# Altium PCB Schematics.PcbDoc
Units mm, origin at the board's own origin, x right, y up, seen from the top; angles counter-clockwise.
Board outline 51 x 43 mm, 2 copper layers (Top Layer, Bottom Layer); 29 components, 26 nets, 122 pads, 33 vias.
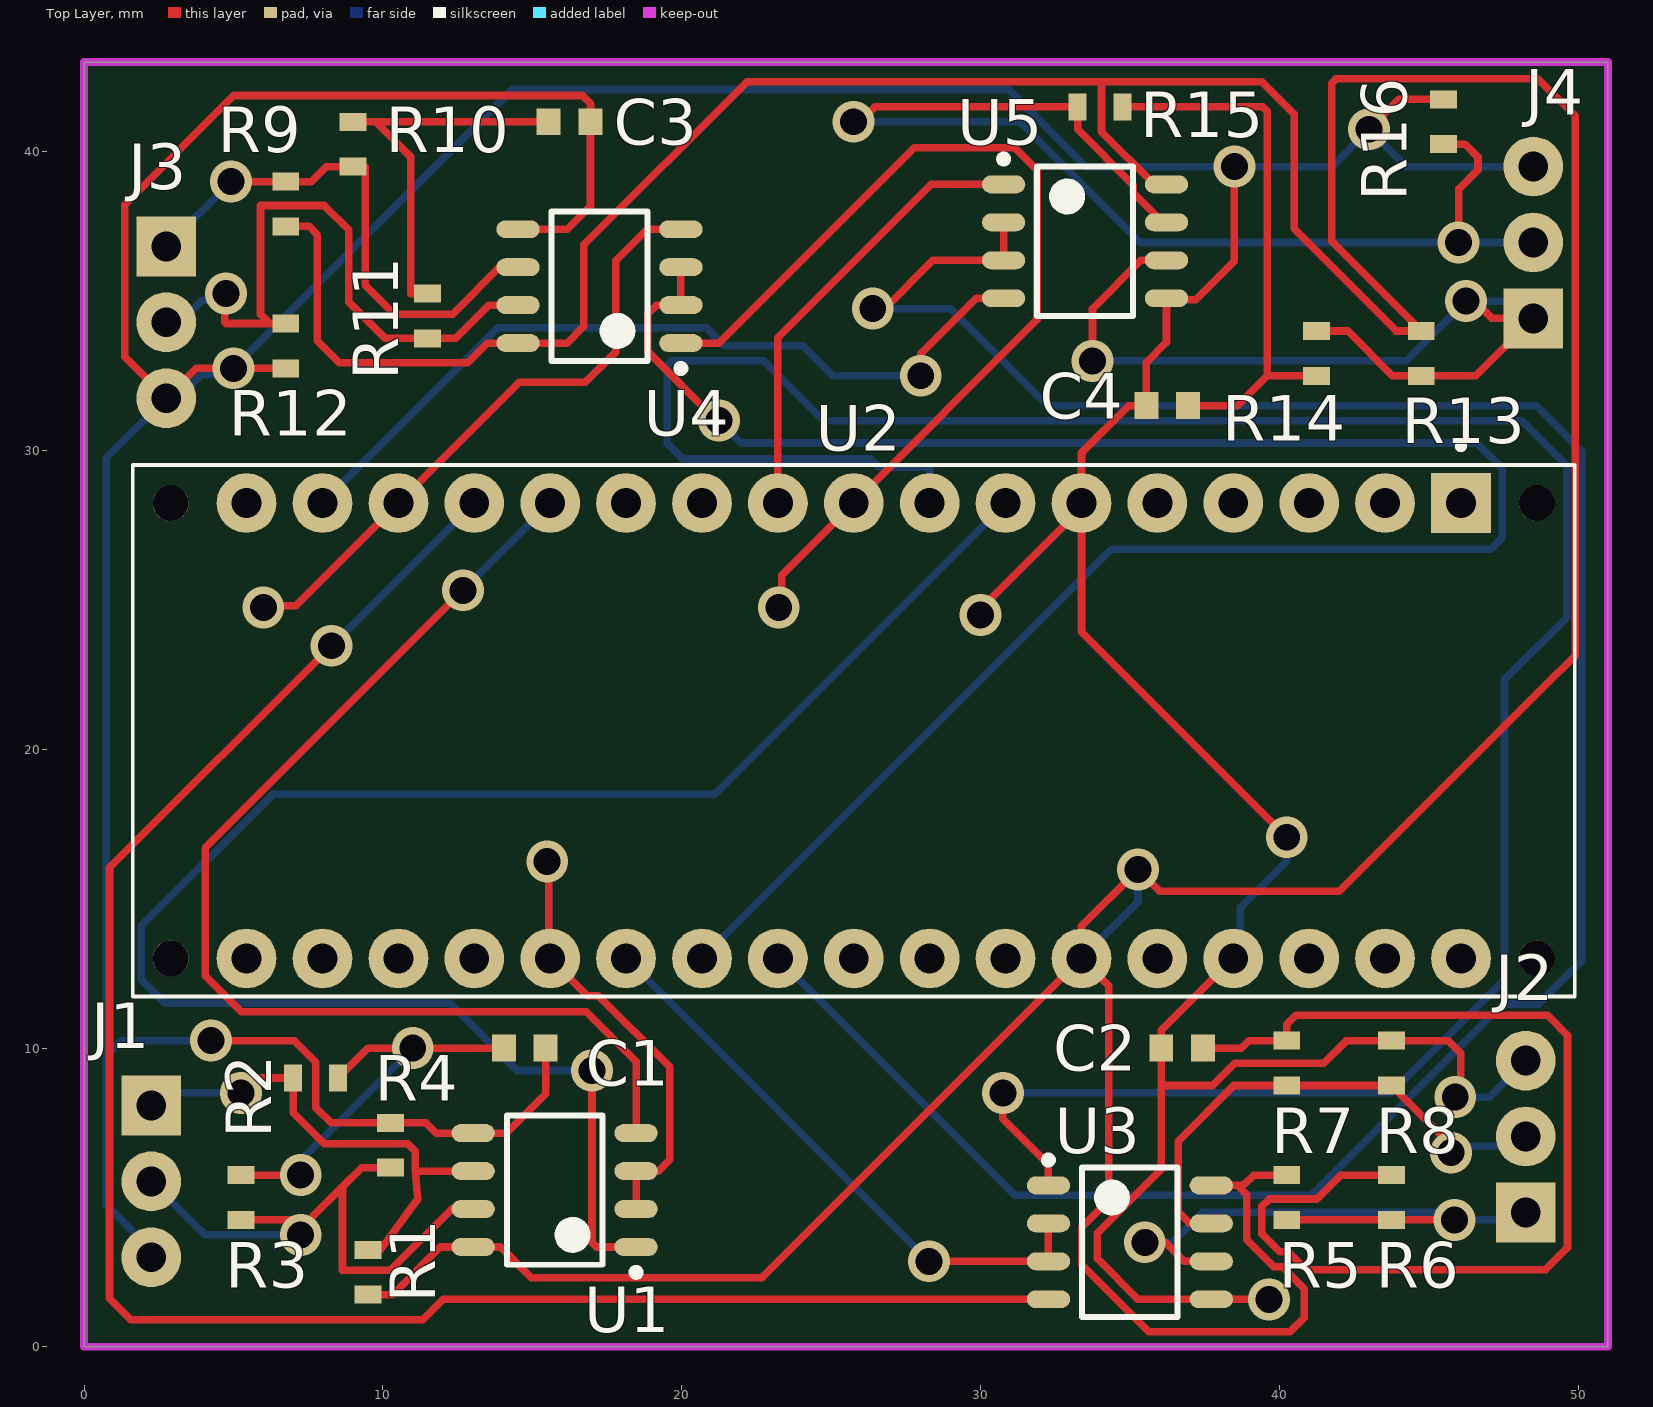
[diagram p0: Top Layer view]
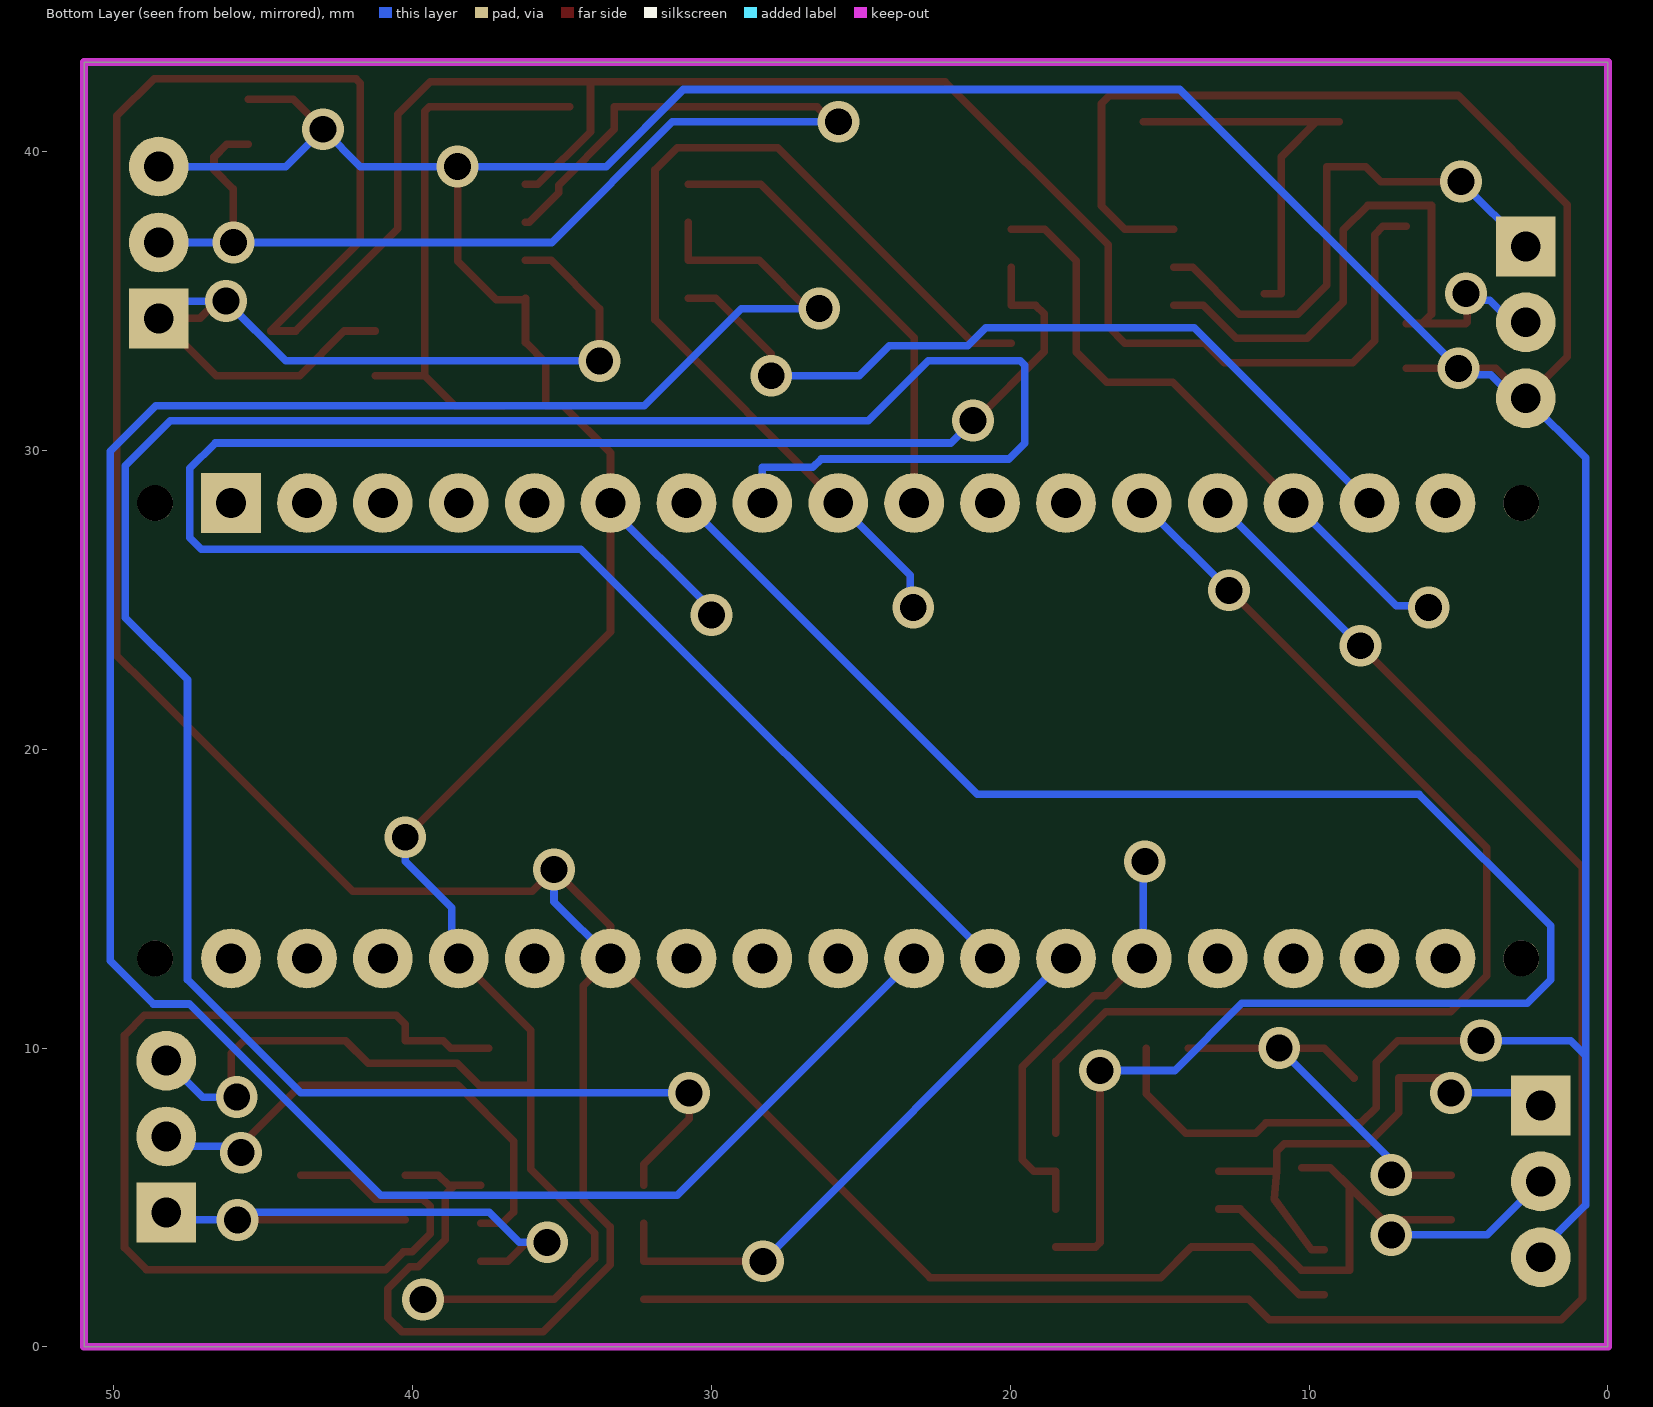
[diagram p1: Bottom Layer view, seen from below]
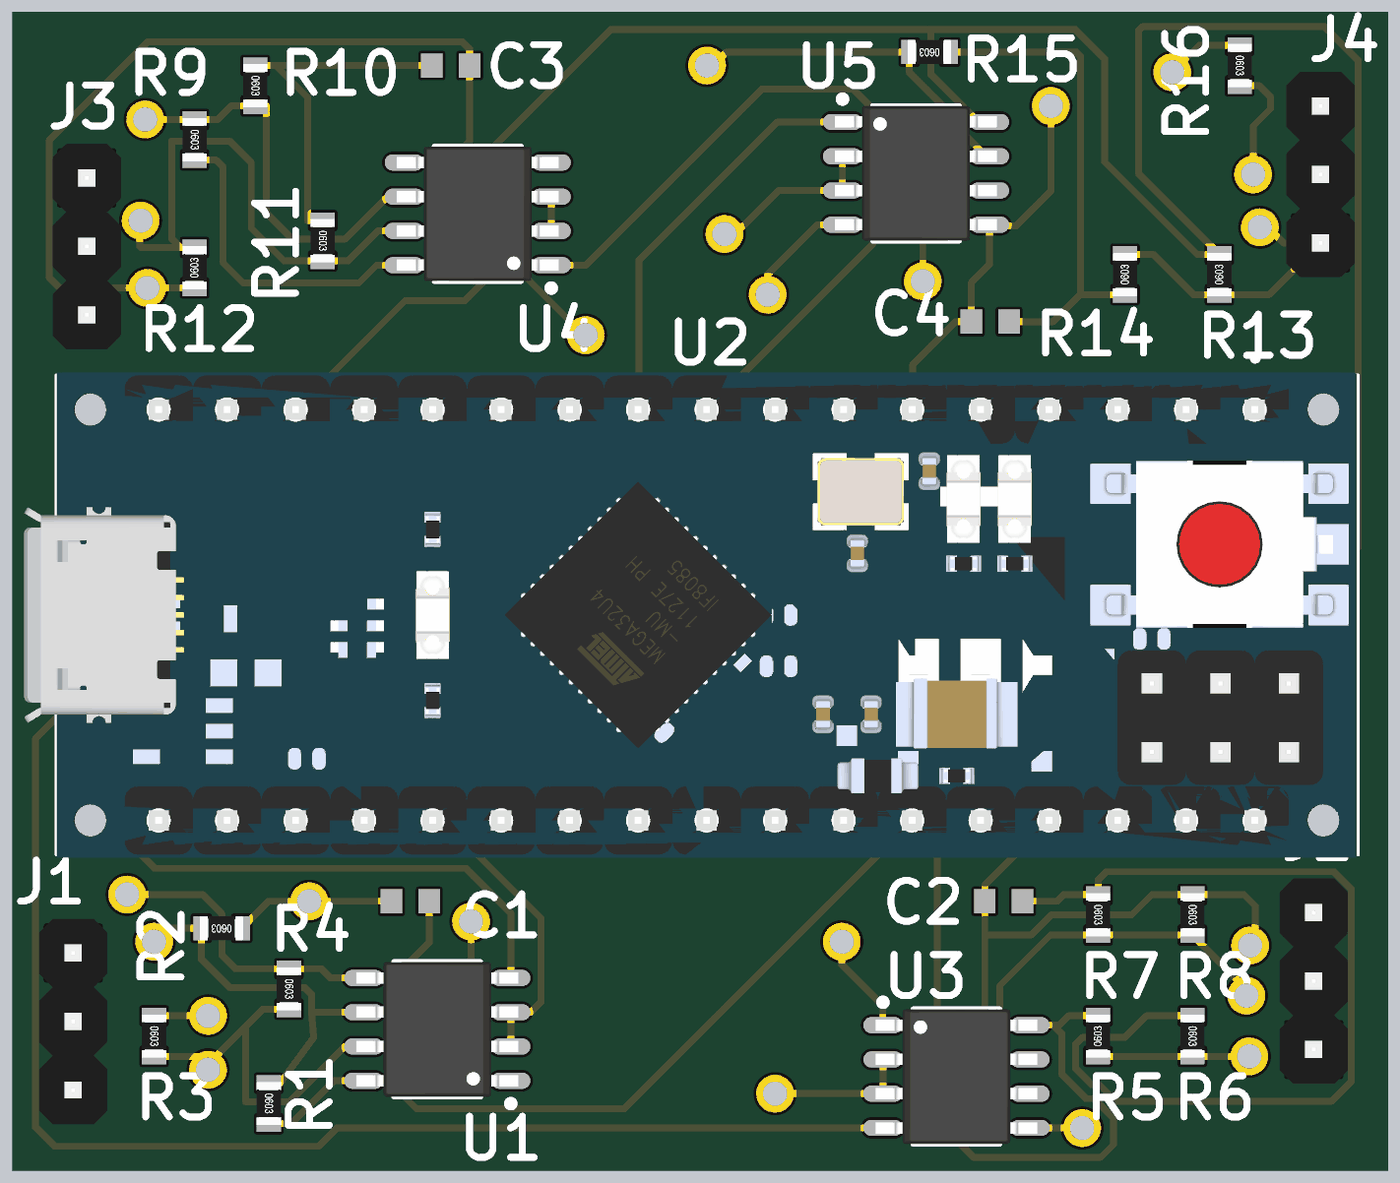
[diagram p2: 3D render of the assembled board from above, using the file's embedded part models]

## Layer stack, top to bottom
Top Solder: solder mask 0.0102, Solder Resist, Dk 3.5
Top Layer: signal copper 0.0356
Dielectric 1: dielectric 0.32, FR-4, Dk 4.8
Bottom Layer: signal copper 0.0356
Bottom Solder: solder mask 0.0102, Solder Resist, Dk 3.5

## Board outline
0,0 51,0 51,43 0,43

## Design rules (kind name [scope] priority, off if disabled: settings)
Clearance Clearance_1 [InNamedPolygon('GND_L02_P000')] p1: gap=1 ignorepadtopadclearanceinfootprint=FALSE
Clearance [All] p2: gap=0.254 ignorepadtopadclearanceinfootprint=FALSE except(0: Arc-Hole Track-Hole SMDPad-Hole THPad-Hole Via-Hole Fill-Hole Poly-Hole Region-Hole Text-Hole)
PlaneClearance [All] p1: clearance=1
PolygonConnect [All] p1: connectstyle=Relief reliefconductorwidth=0.254 reliefentries=4 polygonreliefangle="90 Angle" airgapwidth=0.254
RoutingVias [All] p1: holewidth=0.9 width=1.4 viastyle="Through Hole" minholewidth=0.711 minwidth=1.27 maxholewidth=0.9 maxwidth=1.4
SolderMaskExpansion [All] p1: expansion=0.102 istentingtop=FALSE
Width [All] p1: maxlimit=0.254 minlimit=0.254 preferedwidth=0.254
29 further rules are at their usual default settings.

## Classes and differential pairs
net class "DIFF PAIR DATA": D_N1 D_N2 D_N3 D_N4 D_P1 D_P2 D_P3 D_P4

## Components (designator, comment, footprint, x,y, rotation, side; value= is the part's Value field where it differs from the comment)
C1 "06035C104K4Z2A" 1608[0603] 14.75,10 r180 top
C2 "06035C104K4Z2A" 1608[0603] 36.75,10 r0 top
C3 "06035C104K4Z2A" 1608[0603] 16.25,41 r180 top
C4 "06035C104K4Z2A" 1608[0603] 36.25,31.5 r0 top
J1 "349873-345-34_2" "Header 1x3 male" 2.25,3 r0 top
J2 "349873-345-34_2" "Header 1x3 male" 48.25,9.58 r180 top
J3 "349873-345-34_2" "Header 1x3 male" 2.75,31.75 r0 top
J4 "349873-345-34_2" "Header 1x3 male" 48.5,39.5 r180 top
R1 "CPF-A-0603B100KE1" R0603 9.5,2.5 r270 top value=100K
R2 "CPF-A-0603B100KE1" R0603 7.75,9 r180 top value=60R
R3 "CPF-A-0603B100KE1" R0603 5.25,5 r270 top value=60R
R4 "CPF-A-0603B100KE1" R0603 10.25,6.75 r270 top value=100K
R5 "CPF-A-0603B100KE1" R0603 40.25,5 r90 top value=100K
R6 "CPF-A-0603B100KE1" R0603 43.75,5 r270 top value=60R
R7 "CPF-A-0603B100KE1" R0603 40.25,9.5 r270 top value=60R
R8 "CPF-A-0603B100KE1" R0603 43.75,9.5 r270 top value=100K
R9 "CPF-A-0603B100KE1" R0603 6.75,38.25 r270 top value=100K
R10 "CPF-A-0603B100KE1" R0603 9,40.25 r270 top value=60R
R11 "CPF-A-0603B100KE1" R0603 11.5,34.5 r270 top value=60R
R12 "CPF-A-0603B100KE1" R0603 6.75,33.5 r90 top value=100K
R13 "CPF-A-0603B100KE1" R0603 44.75,33.25 r90 top value=100K
R14 "CPF-A-0603B100KE1" R0603 41.25,33.25 r90 top value=60R
R15 "CPF-A-0603B100KE1" R0603 34,41.5 r180 top value=60R
R16 "CPF-A-0603B100KE1" R0603 45.5,41 r270 top value=100K
U1 "RS485 tranciever" ST485CDR 15.75,5.25 r180 top
U2 "A000053" *ARDUINO_A000053 25.76,20.62 r270 top
U3 "RS485 tranciever" ST485CDR 35,3.5 r0 top
U4 "RS485 tranciever" ST485CDR 17.25,35.5 r180 top
U5 "RS485 tranciever" ST485CDR 33.5,37 r0 top

## Footprints (in the part's own frame and the unit in brackets; to place one, negate y for a bottom-side part, rotate by r counter-clockwise, add the part's x,y. Pads: shape width x height; smd on the part's side, far side on the other; paste and mask are expansions set on the pad)
1608[0603] [mm] "Chip Capacitor, Body 1.6x0.8mm, IPC High Density"
  rect 0.8x0.9 smd: 1(-0.7,0) 2(0.7,0)
  body extent -0.87,-0.48 0.87,0.48, height 1.3
*ARDUINO_A000053 [mm]
  rect 2x2 hole 1: 1(-7.62,20.32)
  round 2 hole 1: 2(-7.62,17.78) 3(-7.62,15.24) 4(-7.62,12.7) 5(-7.62,10.16) 6(-7.62,7.62) 7(-7.62,5.08) 8(-7.62,2.54) 9(-7.62,0) 10(-7.62,-2.54) 11(-7.62,-5.08) 12(-7.62,-7.62) 13(-7.62,-10.16) 14(-7.62,-12.7) 15(-7.62,-15.24) 16(-7.62,-17.78) 17(-7.62,-20.32) 18(7.62,-20.32) 19(7.62,-17.78) 20(7.62,-15.24) 21(7.62,-12.7) 22(7.62,-10.16) 23(7.62,-7.62) 24(7.62,-5.08) 25(7.62,-2.54) 26(7.62,0) 27(7.62,2.54) 28(7.62,5.08) 29(7.62,7.62) 30(7.62,10.16) 31(7.62,12.7) 32(7.62,15.24) 33(7.62,17.78) 34(7.62,20.32)
  round 1.2 hole 1.2 unplated: None(-7.62,22.86) None(-7.62,-22.86) None(7.62,22.86) None(7.62,-22.86)
  silkscreen extent -9.62,-24.13 8.89,24.13, body extent -9,-25.33 9,24.08, height 13.1
"Header 1x3 male" [mm]
  rect 2x2 hole 1: 1(0,5.08)
  round 2 hole 1: 2(0,2.54) 3(0,0)
  body extent -1.27,-1.27 1.27,6.35, height 8.89
R0603 [mm]
  rect 0.6x0.9 smd: 1(-0.75,0) 2(0.75,0)
  body extent -0.8,-0.45 0.8,0.45, height 0.5
ST485CDR [mm] "SOIC, 8-Leads, Body 4.90x3.90mm, Pitch 1.27mm, IPC Medium Density"
  oval 1.45x0.6 smd: 1(-2.725,1.905) 2(-2.725,0.635) 3(-2.725,-0.635) 4(-2.725,-1.905) 5(2.725,-1.905) 6(2.725,-0.635) 7(2.725,0.635) 8(2.725,1.905)
  silkscreen extent -2.85,-2.5 1.6,2.88, body extent -3,-2.5 3,2.5, height 1.75

## Part data
C1 C2 C3 C4: "0.1ÂµF Â±10% 50V Ceramic Capacitor X7R 0603 _1608 Metric_", Package="1608 AVX", Digi-Key_Part_Number=478-6344-1-ND, MF=AVX, MP=06035C104K4Z2A, SnapEDA_Link=https://www.snapeda.com/parts/06035C104K4Z2A/AVX/view-part/572777/?ref=snap
J1 J2 J3 J4: "Header 1x3 male 2.54mm"
R1 R2 R3 R4 R5 R6 R7 R8 R9 R10 R11 R12 R13 R14 R15 R16: "R0603"
U1 U3 U4 U5: library part ST485CDR, "RS485 tranciever single", Supplier Part Number 1=1564307, Supplier 1=Farnell
U2: "MCU, ARDUINO MICRO, LEONARDO BASED, ATMEGA32u4, 5V, USB-MICRO", Package=None, Availability=Unavailable, MF=Arduino, MP=A000053, Price=None, SnapEDA_Link=https://www.snapeda.com/parts/A000053/Arduino/view-part/?ref=snap

## Via types
v1: diameter 1.4, hole 0.9, Top Layer to Bottom Layer, 33 vias

## Nets (pads, with @x,y where several pads share a name; then routed paths per layer and width w, separated by ;. In a path a pad name is that pad's centre, name@x,y a point inside that pad or via, vN(x,y) a via of type N, cw(c..) or ccw(c..) an arc to the next point about the centre after c; other vN are vias at no path point)
+5V: R1.2 R5.2 R9.2 R13.2 U1.8 U2.29 U3.8 U4.8 U5.8 | length 176.9
  Top Layer w0.254: R9.2 7.532,37.5 7.811,37.221 7.811,33.677 8.548,32.94 12.846,32.94 13.501,33.595 U4.8 16.168,33.595 16.727,34.154 16.727,36.877 22.188,42.338 34.05,42.338 ; R1.2 10.324,1.75 11.919,3.345 U1.8 13.937,3.345 14.974,2.308 22.688,2.308 U2.29 ; U5.8 35.813,38.905 34.05,40.669 34.05,42.338 ; U3.8 38.598,5.405 ; R5.2 39.144,5.75 38.799,5.405 38.598,5.405 ; U2.29 33.38,14.084 v1(35.273,15.977) 36,15.25 42.013,15.25 48.883,22.12 49.899,23.136 49.899,41.195 48.655,42.44 41.899,42.44 41.75,42.291 41.75,37 R13.2 43.919,34 40.498,37.421 40.498,41.252 39.412,42.338 34.05,42.338 ; U2.29 34.288,12.092 34.288,4.905 33.395,4.012 33.395,2.75 35.637,0.508 40.359,0.508 40.831,0.98 40.831,1.948 40.097,2.682 39.811,2.682 38.911,3.582 38.911,5.092 38.598,5.405
  Bottom Layer w0.254: U2.29 35.273,14.893 v1(35.273,15.977)
D_N1: J1.2 R3.2 R4.2 U1.7 | length 19.5
  Top Layer w0.254: R3.2 7,4.25 7.25,4 v1(7.25,3.75) ; v1@7.544,4.25 8.65,5.356 ; R4.2 9.294,6 8.65,5.356 ; U1.7 12.308,4.615 10.255,2.562 8.65,2.562 8.65,5.356
  Bottom Layer w0.254: J1.2 4.04,3.75 v1(7.25,3.75)
D_N2: J2.2 R7.2 R8.2 U3.7 | length 17.3
  Top Layer w0.254: U3.7 36.996,4.135 36.615,4.516 36.615,6.88 38.485,8.75 R7.2 R8.2 45.75,6.75 v1(45.75,6.5)
  Bottom Layer w0.254: v1(45.75,6.5) 45.969,6.719 47.929,6.719 J2.2
D_N3: J3.2 R11.2 R12.2 U4.7 | length 21.8
  Top Layer w0.254: v1(4.75,35.25) 4.713,35.213 4.713,34.29 4.753,34.25 6.222,34.25 ; R12.2 6.222,34.25 ; U4.7 13.549,34.865 12.434,33.75 R11.2 10.072,33.75 8.853,34.969 8.853,37.385 8.04,38.198 5.906,38.198 5.906,34.566 6.222,34.25
  Bottom Layer w0.254: J3.2 3.221,34.29 3.962,35.031 4.531,35.031 v1(4.75,35.25)
D_N4: J4.2 R15.2 R16.2 U5.7 | length 41.8
  Top Layer w0.254: v1(25.75,41) 25.972,41 26.472,41.5 R15.2 33.25,40.75 35.119,38.881 35.119,38.623 36.107,37.635 U5.7 ; R16.2 46.222,40.25 46.651,39.821 46.651,39.401 46,38.75 v1(46,36.96)
  Bottom Layer w0.254: v1(25.75,41) 31.313,41 35.353,36.96 v1(46,36.96) J4.2
D_P1: J1.1 R1.1 R2.2 U1.6 | length 17.3
  Top Layer w0.254: v1(5.25,8.5) 5.25,9 R2.2 7,7.844 8.04,6.804 10.834,6.804 11.088,6.55 11.088,5.885 ; R1.1 9.92,3.25 11.167,4.948 11.088,5.885 ; U1.6 11.088,5.885
  Bottom Layer w0.254: J1.1 2.67,8.5 v1(5.25,8.5)
D_P2: J2.1 R5.1 R6.2 U3.6 | length 21.7
  Top Layer w0.254: v1(35.5,3.5) 36.185,3.5 36.82,2.865 U3.6 ; R5.1 R6.2 v1(45.861,4.25) v1@46.111,4.5
  Bottom Layer w0.254: v1(35.5,3.5) 36.435,3.5 37.435,4.5 v1@45.861,4.5 ; v1(45.861,4.25) 48,4.25 J2.1
D_P3: J3.1 R9.1 R10.2 U4.6 | length 17.9
  Top Layer w0.254: v1(4.92,39) R9.1 7.608,39 8.108,39.5 R10.2 9.412,39.5 9.412,35.531 10.377,34.566 12.333,34.566 13.902,36.135 U4.6
  Bottom Layer w0.254: J3.1 v1(4.92,39)
D_P4: J4.1 R13.1 R14.2 U5.6 | length 31.9
  Top Layer w0.254: v1(33.75,33) 33.75,34.745 35.37,36.365 U5.6 ; R14.2 42.286,34 43.786,32.5 R13.1 46.58,32.5 J4.1 47.119,34.42 46.538,35.001 v1(46.249,35.001)
  Bottom Layer w0.254: v1(33.75,33) 44.248,33 v1(46.249,35.001) 47.919,35.001 J4.1
GND: C1.1 C2.1 C3.1 C4.1 J1.3 J2.3 J3.3 J4.3 R4.1 R8.1 R12.1 R16.1 U1.5 U2.6 U2.31 U3.5 U4.5 U5.5 | length 216.5
  Top Layer w0.254: v1(4.25,10.25) 7.039,10.25 7.761,9.528 7.761,8.008 8.269,7.5 R4.1 11.444,7.5 11.789,7.155 U1.5 14.136,7.155 15.45,8.469 C1.1 ; R12.1 v1(5,32.75) 3.75,32.75 J3.3 1.36,33.14 1.36,38.224 5.017,41.881 16.676,41.881 16.95,41.607 C3.1 16.95,38.187 16.168,37.405 U4.5 ; v1(30,24.5) 30,24.68 U2.6@33.38,28.06 ; U2.31 36.05,10.59 C2.1 36.05,8.75 ; v1(38.5,39.5) 38.5,36.341 37.206,35.048 36.273,35.048 U5.5 36.225,33.615 35.55,32.94 C4.1 34.964,31.5 33.38,29.916 U2.6 U2.6@33.38,28.06 ; v1(39.661,1.589) 39.658,1.592 37.728,1.592 U3.5 35.268,1.595 33.903,2.96 33.903,3.802 36.05,5.949 36.05,8.75 ; v1(40.25,17.058) 33.38,23.928 U2.6@33.38,28.06 ; v1(43,40.75) 44,41.75 R16.1 ; v1(45.889,8.361) 46.076,8.548 46.076,9.831 45.657,10.25 R8.1 42.25,10.25 41.492,9.492 38.509,9.492 37.767,8.75 36.05,8.75 ; J2.3@47.999,9.831 J2.3
  Bottom Layer w0.254: J1.3 2.25,3.25 0.75,4.75 0.75,9.75 ; v1(4.25,10.25) 1.25,10.25 0.75,9.75 ; v1(30,24.5) 30,24.68 33.5,28.18 U2.6@33.5,28.25 ; U2.31 38.691,13.231 38.691,14.691 40.25,16.25 v1(40.25,17.058) ; v1(45.889,8.361) 47.031,8.361 J2.3 ; J4.3 44.25,39.5 v1(43,40.75) 41.75,39.5 v1(38.5,39.5) 33.532,39.5 30.951,42.081 14.331,42.081 v1(5,32.75) 4.781,32.531 3.922,32.531 3.142,31.75 J3.3 0.75,29.75 0.75,9.75
NetC1_2: C1.2 R2.1 R3.1 | length 14.3
  Top Layer w0.254: R3.1 v1(7.25,5.75) ; R2.1 9.5,10 C1.2 ; v1@10.5,10 v1(11,10)
  Bottom Layer w0.254: v1(7.25,5.75) 7.25,6.25 v1(11,10)
NetC2_2: C2.2 R6.1 R7.1 | length 37.1
  Top Layer w0.254: C2.2 38.723,10 38.973,10.25 R7.1 40.25,10.794 40.552,11.096 48.985,11.096 49.645,10.436 49.645,3.324 48.909,2.587 40.91,2.587 40.307,3.19 40.021,3.19 39.419,3.792 39.419,4.708 39.661,4.95 41.25,4.95 42.051,5.75 R6.1
NetC3_2: C3.2 R10.1 R11.1 | length 13.4
  Top Layer w0.254: R10.1 9.759,41 ; R11.1 10.937,35.25 10.937,39.822 9.759,41 ; C3.2 9.759,41
NetC4_2: C4.2 R14.1 R15.1 | length 18.5
  Top Layer w0.254: R15.1 39.447,41.5 39.596,41.351 39.596,32.5 ; C4.2 38.596,31.5 39.596,32.5 ; R14.1 39.596,32.5
NetU1_1: U1.1 U2.7 | length 60.2
  Top Layer w0.254: v1(17,9.25) 17,3.494 17.149,3.345 U1.1
  Bottom Layer w0.254: v1(17,9.25) 14.5,9.25 12.25,11.5 2.709,11.5 1.919,12.29 1.919,14.094 6.325,18.5 21.1,18.5 U2.7
NetU1_2: U1.2 U1.3 U2.22 | length 17.7
  Top Layer w0.254: v1(15.5,16.25) 15.55,16.2 15.55,13.05 U2.22 16.843,11.757 17.209,11.757 19.597,9.369 19.597,6.266 19.216,5.885 U1.3 U1.2
  Bottom Layer w0.254: v1(15.5,16.25) 15.55,16.2 15.55,13.05 U2.22
NetU1_4: U1.4 U2.13 | length 38.6
  Top Layer w0.254: v1(12.68,25.32) 4.059,16.699 4.059,12.428 5.264,11.223 16.803,11.223 18.475,9.551 U1.4
  Bottom Layer w0.254: v1(12.68,25.32) U2.13
NetU2_8: U2.8 U3.1 | length 84.7
  Top Layer w0.254: v1(30.75,8.5) 30.75,7.64 32.272,6.118 32.272,5.405 U3.1
  Bottom Layer w0.254: U2.8 28.3,29.435 26.607,29.435 26.328,29.715 20.054,29.715 19.521,30.248 19.521,32.851 19.67,33 22.75,33 24.758,30.992 48.114,30.992 49.62,29.486 49.62,24.406 47.537,22.323 47.537,12.287 43.75,8.5 v1(30.75,8.5)
NetU2_9: U2.9 U4.1 | length 37.7
  Top Layer w0.254: U4.1 21.248,33.595 27.782,40.129 31.154,40.129 31.891,39.392 31.891,34.371 U2.9 23.351,25.831 23.351,24.851 v1(23.25,24.75)
  Bottom Layer w0.254: v1(23.25,24.75) 23.351,24.851 23.351,25.831 U2.9
NetU2_10: U2.10 U5.1 | length 15.2
  Top Layer w0.254: U2.10 23.22,33.765 28.36,38.905 U5.1
NetU2_14: U2.14 U3.4 | length 63.7
  Top Layer w0.254: v1(8.285,23.465) 0.852,16.032 0.852,1.622 1.563,0.911 11.342,0.911 12.026,1.595 U3.4
  Bottom Layer w0.254: v1(8.285,23.465) U2.14
NetU2_15: U2.15 U4.4 | length 27
  Top Layer w0.254: v1(6,24.75) 6.051,24.801 7.081,24.801 U2.15 14.56,32.28 16.778,32.28 17.794,33.296 17.794,36.344 18.855,37.405 U4.4
  Bottom Layer w0.254: v1(6,24.75) 6.051,24.801 7.081,24.801 U2.15
NetU2_16: U2.16 U5.4 | length 27.4
  Top Layer w0.254: v1(28,32.5) 28,33.241 29.854,35.095 U5.4
  Bottom Layer w0.254: U2.16 13.849,34.109 20.826,34.109 21.426,33.508 24.054,33.508 25.062,32.5 v1(28,32.5)
NetU2_23: U2.23 U3.2 U3.3 | length 19.6
  Top Layer w0.254: v1(28.275,2.865) U3.3 U3.2
  Bottom Layer w0.254: U2.23 v1(28.275,2.865)
NetU2_24: U2.24 U4.2 U4.3 | length 68.9
  Top Layer w0.254: U4.3 U4.2 19.159,34.865 18.869,34.575 18.869,33.313 21.182,31 v1(21.25,31)
  Bottom Layer w0.254: U2.24 34.372,26.692 47.071,26.692 47.461,27.082 47.461,29.398 46.609,30.25 22,30.25 v1(21.25,31)
NetU2_25: U2.25 U5.2 U5.3 | length 82.5
  Top Layer w0.254: v1(26.396,34.75) 26.791,34.75 28.406,36.365 U5.3 U5.2
  Bottom Layer w0.254: U2.25 31.143,5.077 41.077,5.077 47.477,11.477 48.68,11.477 50.128,12.925 50.128,29.969 48.596,31.5 32.25,31.5 29,34.75 v1(26.396,34.75)
pads on no net: U2.1 U2.2 U2.3 U2.4 U2.5 U2.11 U2.12 U2.17 U2.18 U2.19 U2.20 U2.21 U2.26 U2.27 U2.28 U2.30 U2.32 U2.33 U2.34 U2.None

## Keep-outs
Keep-Out Layer:
  the board outline again, w0.254